# Altium PCB PCB1.PcbDoc
Units mil, origin at the board's own origin, x right, y up, seen from the top; angles counter-clockwise.
Board outline 3095 x 3020 mil, 2 copper layers (Top Layer, Bottom Layer); 16 components, 20 nets, 102 pads, 0 vias.
Unrouted connection lines stored in the file: 1.
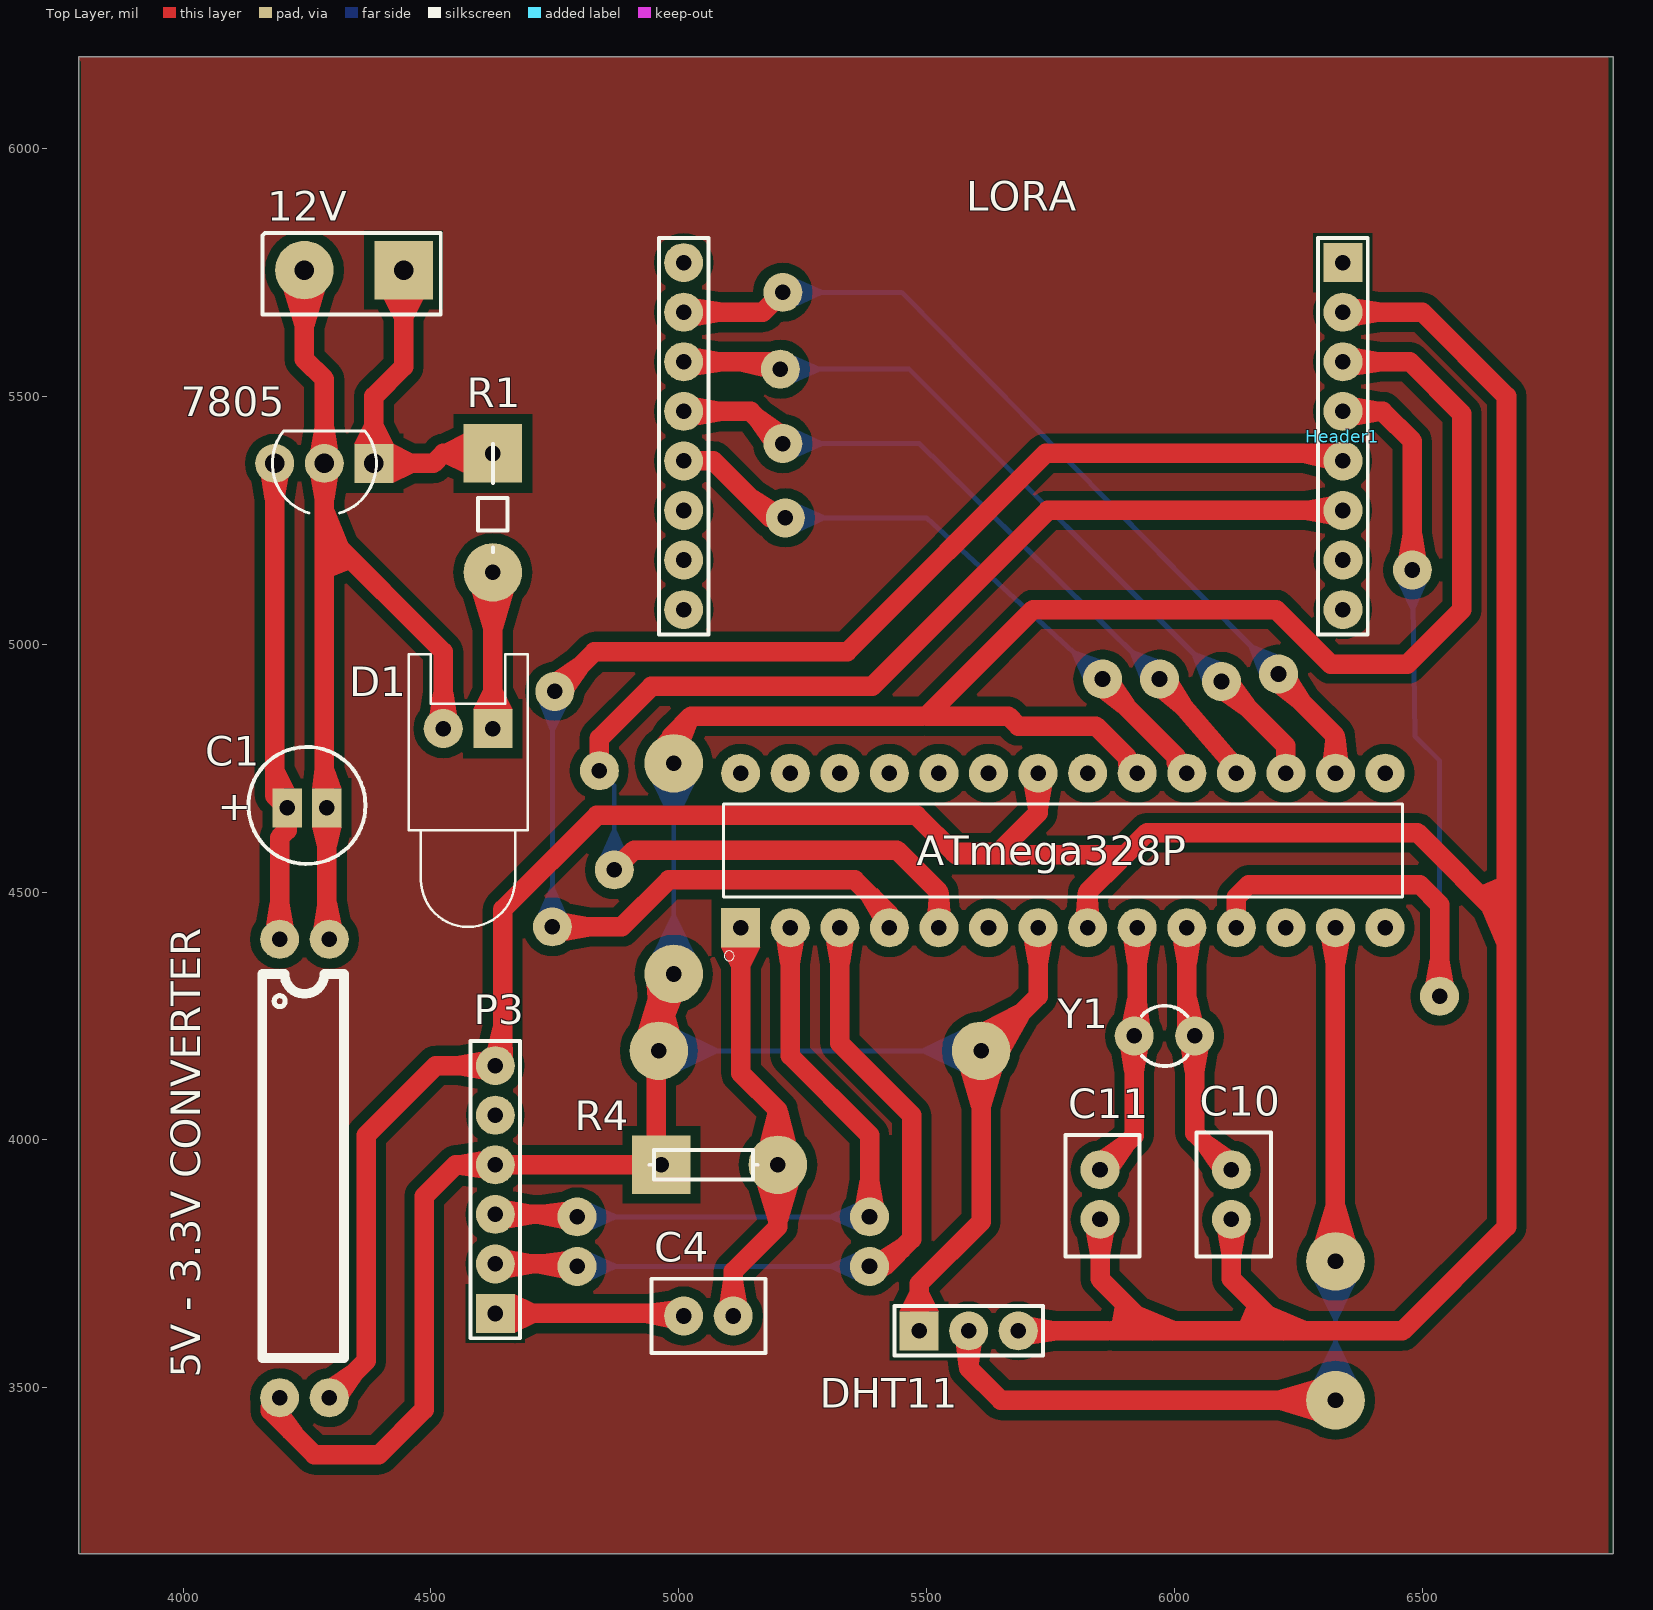
[diagram p0: Top Layer view]
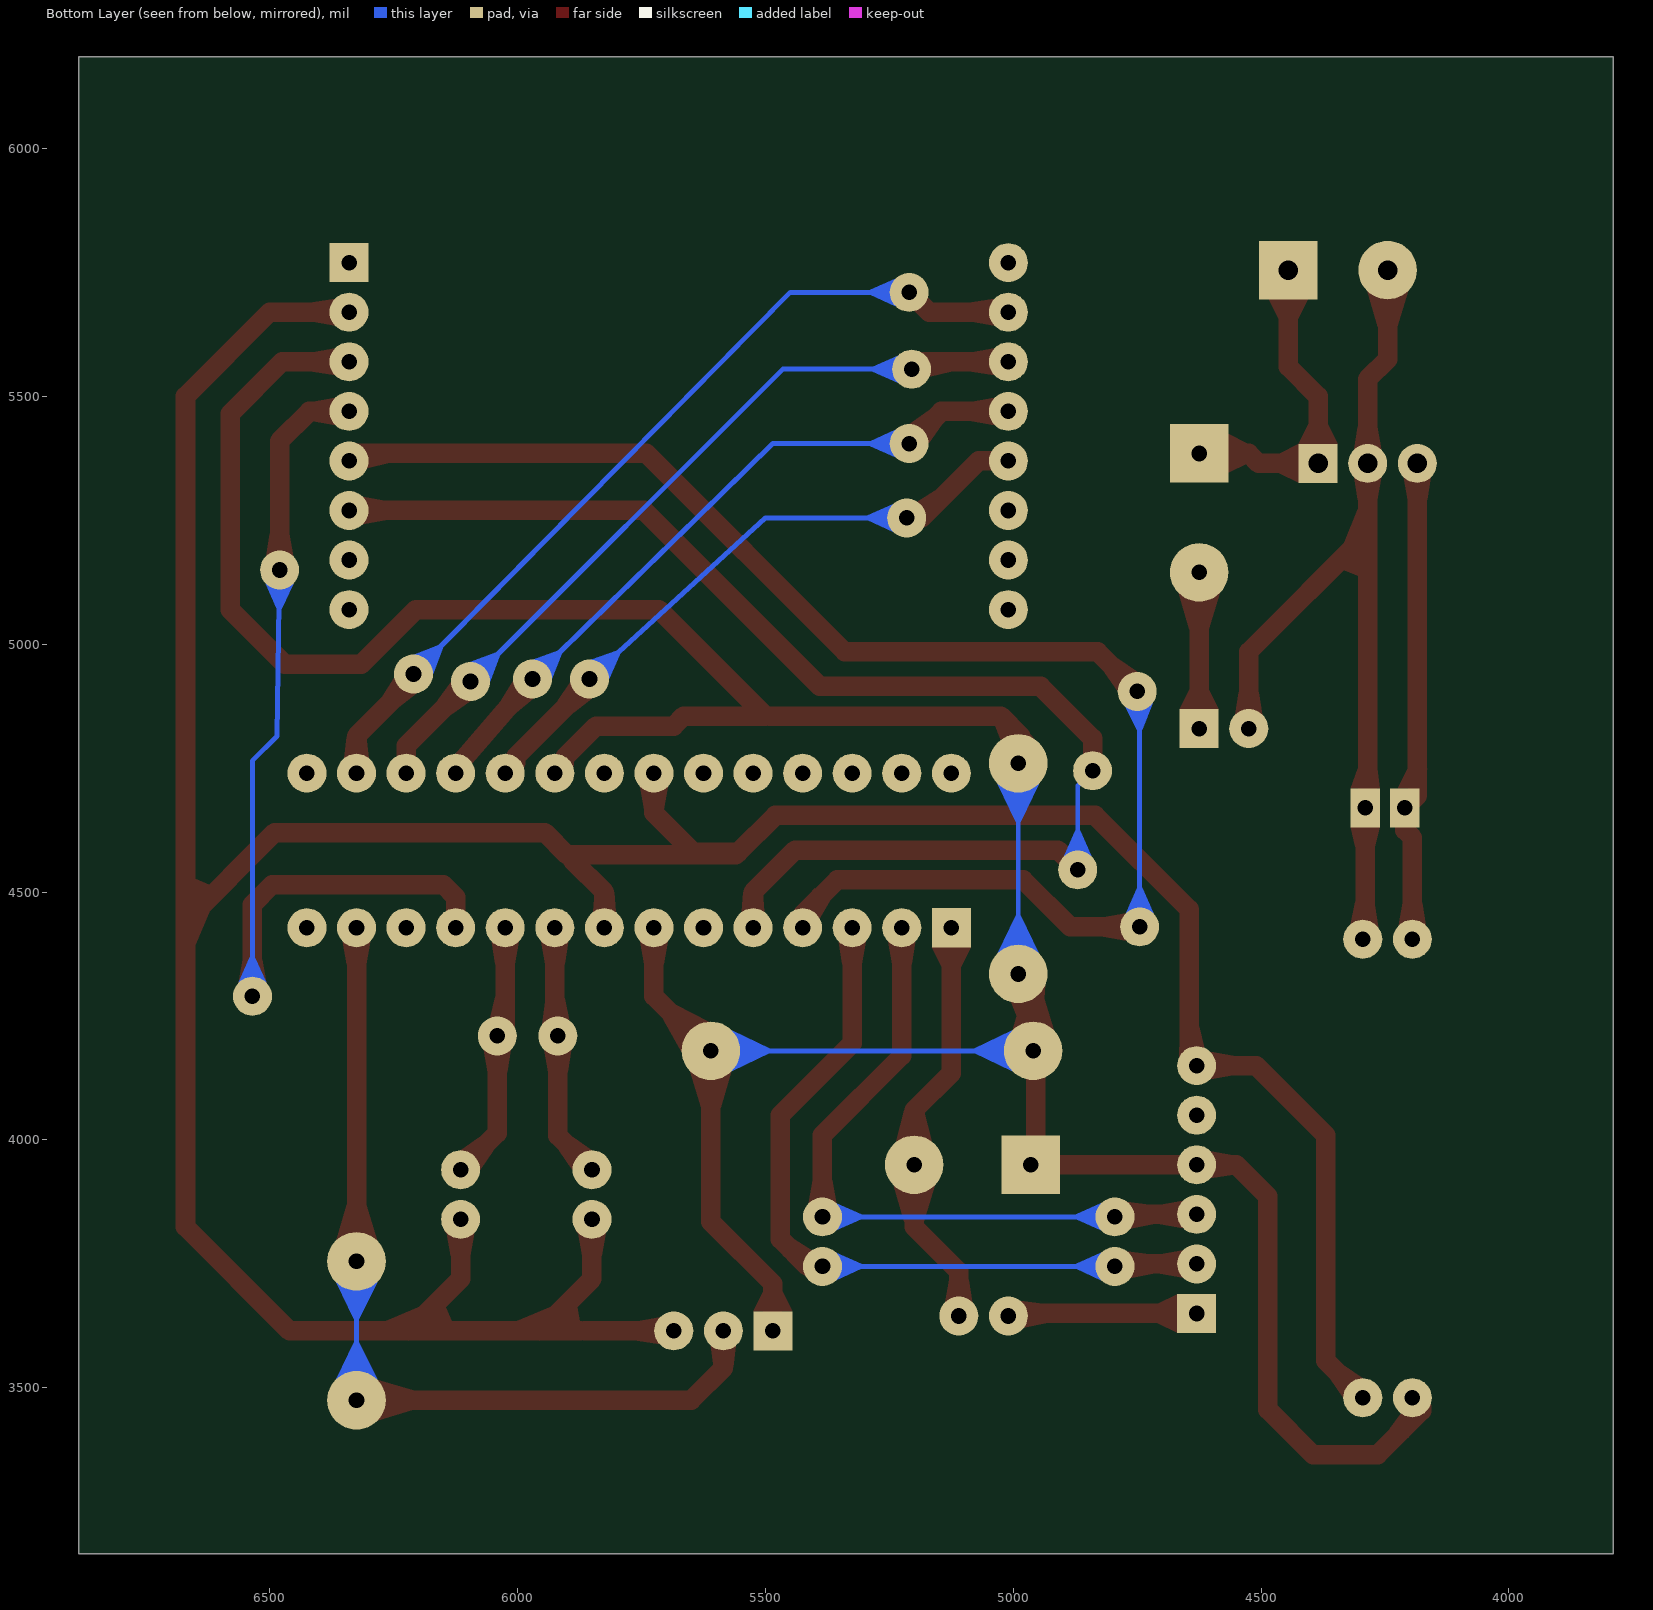
[diagram p1: Bottom Layer view, seen from below]

## Layer stack, top to bottom
Top Solder: solder mask 0.4, Solder Resist, Dk 3.5
Top Layer: signal copper 1.4
Dielectric 1: dielectric 12.6, FR-4, Dk 4.8
Bottom Layer: signal copper 1.4
Bottom Solder: solder mask 0.4, Solder Resist, Dk 3.5

## Board outline
3790,3165 6885,3165 6885,6185 3790,6185

## Design rules (kind name [scope] priority, off if disabled: settings)
Clearance [All] p1: gap=20 ignorepadtopadclearanceinfootprint=TRUE
PolygonConnect [All] p1: connectstyle=Relief reliefconductorwidth=10 reliefentries=4 polygonreliefangle="90 Angle" airgapwidth=10
RoutingVias [All] p1: holewidth=31.5 width=196.85 viastyle="Through Hole" minholewidth=11.81 minwidth=39.37 maxholewidth=59.06 maxwidth=118.11
SolderMaskExpansion [All] p1: expansion=4
Width [All] p1: maxlimit=39.37 minlimit=10 preferedwidth=19.68
30 further rules are at their usual default settings.

## Components (designator, comment, footprint, x,y, rotation, side; value= is the part's Value field where it differs from the comment)
"5V - 3.3V CONVERTER" "Mach Nguon 3.3V" PCBComponent_1 4300,4180 r270 top (schematic designator "Mach Nguon")
12V "12-15 (V)" HDR1X2 4245,5755 r0 top (schematic designator P1)
7805 "LM7805" TO92- 4285,5365 r180 top (schematic designator U1)
ATmega328P "ATmega328P" DIP794W46P254L2967H457Q28B 5775,4584.09 r90 top
C1 "Cap Pol1" RB7.6-15 4250,4675 r0 top value=10uF
C4 "Cap" RAD-0.3#1 5070,3645 r180 top value=100nF
C10 "Cap" RAD-0.3#2 6120,3990 r90 top value=22pF
C11 "Cap" RAD-0.3#3 5855,3875 r90 top value=22pF
D1 "LED0" LED-0 4575,4830 r0 top
DHT11 "DHT11" HDR1X3 5485,3615 r0 top (schematic designator P2)
Header1 "" HDR1X8#1 6340,5070 r90 top
LORA "" HDR1X8#2 5010,5070 r90 top (schematic designator Header2)
P3 "FT232RL" HDR1X6 4630,3650 r90 top
R1 "Res1" AXIAL-0.3#1 4625,5295 r90 top value=470
R4 "Res1" AXIAL-0.3#2 5050,3950 r180 top value=10K
Y1 "16 MHz" R38 5980,4210 r90 top

## Footprints (in the part's own frame and the unit in brackets; to place one, negate y for a bottom-side part, rotate by r counter-clockwise, add the part's x,y. Pads: shape width x height; smd on the part's side, far side on the other; paste and mask are expansions set on the pad)
AXIAL-0.3#1 [mm] "Axial Device, Thru-Hole; 2 Leads; 0.3 in Pin Spacing"
  round 3 hole 0.8: 1(-3.81,0)
  rect 3x3 hole 0.8: 2(2.286,0)
  silkscreen extent -2.77,-0.76 2.77,0.76
AXIAL-0.3#2 [mm] "Axial Device, Thru-Hole; 2 Leads; 0.3 in Pin Spacing"
  round 3 hole 0.8: 1(-3.81,0)
  rect 3x3 hole 0.8 mask+0.102: 2(2.159,0)
  silkscreen extent -2.77,-0.76 2.77,0.76
DIP794W46P254L2967H457Q28B [mm]
  rect 2x2 hole 0.8: 1(-3.96,16.51)
  round 2 hole 0.8: 2(-3.96,13.97) 3(-3.96,11.43) 4(-3.96,8.89) 5(-3.96,6.35) 6(-3.96,3.81) 8(-3.96,-1.27) 9(-3.96,-3.81) 10(-3.96,-6.35) 11(-3.96,-8.89) 12(-3.96,-11.43) 13(-3.96,-13.97) 14(-3.96,-16.51) 15(3.96,-16.51) 16(3.96,-13.97) 17(3.96,-11.43) 18(3.96,-8.89) 19(3.96,-6.35) 21(3.96,-1.27) 22(3.96,1.27) 23(3.96,3.81) 24(3.96,6.35) 25(3.96,8.89) 26(3.96,11.43) 27(3.96,13.97) 28(3.96,16.51)
  round 2 hole 0.8 mask+0.102: 7(-3.96,1.27) 20(3.96,-3.81)
  silkscreen extent -5.65,-17.4 2.38,17.4
HDR1X2 [mm] "Connector; Header; 2 Position"
  round 3 hole 1: 1(0,0)
  rect 3x3 hole 1: 2(5.08,0)
  silkscreen extent -2.16,-2.29 6.98,1.91
HDR1X3 [mm] "Connector; Header; 3 Position"
  rect 2x2 hole 0.8 mask+0.102: 1(0,0)
  round 2 hole 0.8: 2(2.54,0) 3(5.08,0)
  silkscreen extent -1.27,-1.27 6.35,1.27
HDR1X6 [mm] "Connector; Header; 6 Position"
  rect 2x2 hole 0.8: 1(0,0)
  round 2 hole 0.8: 2(2.54,0) 3(5.08,0) 5(10.16,0) 6(12.7,0)
  round 2 hole 0.8 mask+0.102: 4(7.62,0)
  silkscreen extent -1.27,-1.27 13.97,1.27
HDR1X8#1 [mm] "Connector; Header; 8 Position"
  round 2 hole 0.8: 1(0,0) 2(2.54,0) 3(5.08,0) 4(7.62,0) 5(10.16,0) 7(15.24,0)
  round 2 hole 0.8 mask+0.102: 6(12.7,0)
  rect 2x2 hole 0.8: 8(17.78,0)
  silkscreen extent -1.27,-1.27 19.05,1.27
HDR1X8#2 [mm] "Connector; Header; 8 Position"
  round 2 hole 0.8: 1(0,0) 2(2.54,0) 3(5.08,0) 4(7.62,0) 5(10.16,0) 6(12.7,0) 7(15.24,0) 8(17.78,0)
  silkscreen extent -1.27,-1.27 19.05,1.27
LED-0 [mm] "LED; 2 Leads"
  rect 2x2 hole 0.8: 1(1.27,0)
  round 2 hole 0.8: 2(-1.27,0)
  silkscreen extent -3.05,-10.16 3.05,3.81
PCBComponent_1 [mm]
  round 2 hole 0.8: 1(-5.715,-2.667) 2(-5.715,-0.127) 4(17.78,-0.127)
  round 2 hole 0.8 mask+0.102: 3(17.78,-2.667)
R38 [mm] "Crystal, Thru-Hole; 2 Leads; Body 3.1 x 8.2 mm (Dia.xH)"
  round 2 hole 0.8: 1(0,1.55) 2(0,-1.55)
  silkscreen extent -1.55,-1.19 1.55,1.17
RAD-0.3#1 [mm] "Radial Cap, Thru-Hole; 2 Leads; 0.3 in Pin Spacing"
  round 2 hole 0.8: 1(-1.016,0) 2(1.524,0)
  silkscreen extent -2.67,-1.91 3.18,1.91
RAD-0.3#2 [mm] "Radial Cap, Thru-Hole; 2 Leads; 0.3 in Pin Spacing"
  round 2 hole 0.8: 1(-3.81,0.127) 2(-1.27,0.127)
  silkscreen extent -5.71,-1.91 0.64,1.91
RAD-0.3#3 [mm] "Radial Cap, Thru-Hole; 2 Leads; 0.3 in Pin Spacing"
  round 2 hole 0.8: 1(-0.889,0.127) 2(1.651,0.127)
  silkscreen extent -2.79,-1.91 3.43,1.91
RB7.6-15 [mm] "Polarized Capacitor (Radial); 2 Leads"
  rect 1.5x2 hole 0.8: 1(-1.016,-0.127) 2(1.016,-0.127)
  silkscreen extent -3,-3 3,3
TO92- [mm]
  rect 2x2 hole 1: 1(-2.54,0)
  round 2 hole 1: 2(0,0) 3(2.54,0)
  silkscreen extent -2.66,-1.65 2.66,2.55

## Part data
"5V - 3.3V CONVERTER": library part Component_1
12V: library part "Header 2", "Header, 2-Pin", LatestRevisionDate=17-Jul-2002, LatestRevisionNote="Re-released for DXP Platform.", Publisher="Altium Limited"
7805: "IC REG LIN 5V 1A"
C1: "Polarized Capacitor (Radial)", LatestRevisionDate=17-Jul-2002, LatestRevisionNote="Re-released for DXP Platform.", PackageDescription="Polarized Capacitor (Radial); 2 Leads", PackageReference=RB7.6-15, Published=8-Jun-2000, Publisher="Altium Limited"
C4 C10 C11: "Capacitor", LatestRevisionDate=17-Jul-2002, LatestRevisionNote="Re-released for DXP Platform.", PackageDescription="Radial Cap, Thru-Hole; 2 Leads; 0.3 in Pin Spacing", PackageReference=RAD-0.3, Published=8-Jun-2000, Publisher="Altium Limited"
D1: "Typical INFRARED GaAs LED", LatestRevisionDate=08-Jul-2005, LatestRevisionNote="Mech Layer 1 removed.", PackageDescription="LED; 2 Leads", PackageReference=LED-0, Published=8-Jun-2000, Publisher="Altium Limited"
DHT11: library part "Header 3", "Header, 3-Pin", LatestRevisionDate=17-Jul-2002, LatestRevisionNote="Re-released for DXP Platform.", Publisher="Altium Limited"
Header1 LORA: library part "Header 8", "Header, 8-Pin", LatestRevisionDate=17-Jul-2002, LatestRevisionNote="Re-released for DXP Platform.", Publisher="Altium Limited"
P3: library part "Header 6", "Header, 6-Pin", LatestRevisionDate=17-Jul-2002, LatestRevisionNote="Re-released for DXP Platform.", Publisher="Altium Limited"
R1 R4: "Resistor", LatestRevisionDate=17-Jul-2002, LatestRevisionNote="Re-released for DXP Platform.", PackageDescription="Axial Device, Thru-Hole; 2 Leads; 0.3 in Pin Spacing", PackageReference=AXIAL-0.3, Published=8-Jun-2000, Publisher="Altium Limited"
Y1: library part XTAL, "Crystal Oscillator", LatestRevisionDate=17-Jul-2002, LatestRevisionNote="Re-released for DXP Platform.", PackageDescription="Crystal, Thru-Hole; 2 Leads; Body 3.1 x 8.2 mm (Dia.xH)", PackageReference=R38, Published=8-Jun-2000, Publisher="Altium Limited"

## Free pads (board coordinates)
  round 78.74 hole 31.5: 2(5385,3845) 3(5385,3745) 4(4795,3845) 5(4795,3745) 12(4870,4545) 13(4745,4430) 14(4840,4745) 15(4750,4905) 18(6535,4290) 19(6480,5150) 20(6210,4940) 21(6095,4925) 22(5970,4930) 23(5855,4930) 24(5210,5710) 25(5205,5555) 26(5210,5405) 27(5215,5255)
  round 118.11 hole 31.5 mask+4: 6(4960,4180) 7(5610,4180) 8(4990,4335) 9(4990,4760)
  round 118.11 hole 31.5: 10(6325,3475) 11(6325,3755)

## Nets (pads, with @x,y where several pads share a name; then routed paths per layer and width w, separated by ;. In a path a pad name is that pad's centre, name@x,y a point inside that pad or via, vN(x,y) a via of type N, cw(c..) or ccw(c..) an arc to the next point about the centre after c; other vN are vias at no path point)
1: ATmega328P.1 C4.1 R4.1 | length 851.5
  Top Layer w39.37: C4.1 5110,3735 5200,3825 R4.1 5200,4060 5125,4135 ATmega328P.1
3.3V: "5V - 3.3V CONVERTER.3" ATmega328P.7 ATmega328P.20 DHT11.1 Header1.6 P3.4 pad.6 pad.7 pad.8 pad.9 R4.2 | length 6775.6
  Top Layer w39.37: 4195,3480 4176.25,3461.25 4176.25,3453.75 4265,3365 4395,3365 4486.25,3456.25 4486.25,3886.25 4550,3950 P3.4 R4.2 4955,3960 4955,4165 pad.6 4960,4305 pad.8 ; pad.9 4975,4790 4985,4800 4985,4815 5025,4855 5490,4855 ; DHT11.1 5485,3710 5610,3835 pad.7 ; pad.7@5591.25,4161.25 pad.7 ; ATmega328P.7 5725,4290 5615,4180 pad.7 ; ATmega328P.20 5906.25,4758.75 5906.25,4768.75 5904.06,4770.94 5904.06,4772.75 5841.8,4835 5685,4835 5665,4855 5500,4855 5715,5070 6205,5070 6315,4960 6470,4960 6580,5070 6580,5465 6475,5570 Header1.6
  Bottom Layer w10: pad.6 pad.7 ; pad.8 pad.9
+: 12V.2 7805.1 R1.2 | length 663.1
  Top Layer w39.37: 12V.2 4445,5560 4385,5500 7805.1 4505,5365 4525,5385 R1.2
CTS: P3.5
DIO0: ATmega328P.4 Header1.4 pad.13 pad.15 | length 3047.3
  Top Layer w39.37: pad.13 4885,4430 4980,4525 5355,4525 5425,4455 ATmega328P.4 ; pad.15 4830,4985 5340,4985 5740,5385 6325,5385 Header1.4
  Bottom Layer w10: pad.13 4745,4900 pad.15
DIO1: ATmega328P.5 Header1.3 pad.12 pad.14 | length 2746.6
  Top Layer w39.37: pad.14 4840,4810 4945,4915 5390,4915 5745,5270 Header1.3 ; pad.12 4910,4585 5440,4585 5525,4500 ATmega328P.5
  Bottom Layer w10: pad.14 4870,4715 pad.12
DTR: C4.2 P3.1 | length 382.1
  Top Layer w39.37: P3.1 5005,3650 C4.2
GND: 12V.1 7805.2 "5V - 3.3V CONVERTER.2" "5V - 3.3V CONVERTER.4" ATmega328P.8 ATmega328P.22 C1.2 C10.1 C11.1 D1.2 DHT11.3 Header1.7 P3.6 | length 9469.1
  Top Layer w39.37: 12V.1 4245,5575 4285,5535 7805.2 4285,5225 ; 4295,3480 4370,3555 4370,4010 4510,4150 P3.6 4645,4165 4645,4465 4835,4655 5480,4655 5555,4580 5565,4580 ; 4295,4405 4290,4410 C1.2 4285,4675 4285,5225 ; D1.2 4525,4985 4285,5225 ; DHT11.3 5865,3615 ; ATmega328P.22 5725,4660 5645,4580 5565,4580 ; ATmega328P.8 5825,4500 5890,4565 5890,4575 ; C11.1@5865,3825 C11.1 5850,3720 5955,3615 ; 5875,3615 5955,3615 ; C10.1@6130,3825 C10.1 6115,3720 6220,3615 ; Header1.7 6500,5670 6670,5500 6670,4440 ; 5565,4580 5560,4575 5890,4575 ; 5890,4575 5900,4575 5945,4620 6490,4620 6670,4440 ; 5955,3615 6220,3615 ; 6220,3615 6460,3615 6670,3825 6670,4440
MISO: ATmega328P.18 LORA.5 pad.22 pad.26 | length 1428.3
  Top Layer w10: ATmega328P.18 ATmega328P.18@6125,4750
  Top Layer w39.37: LORA.5 5145,5470 pad.26 ; pad.22 ATmega328P.18@6125,4750
  Bottom Layer w10: pad.26 5485,5405 pad.22
MOSI: ATmega328P.17 LORA.6 pad.21 pad.25 | length 1611
  Top Layer w39.37: LORA.6 5190,5570 pad.25 ; pad.21@6115,4925 pad.21 6225,4795 ATmega328P.17
  Bottom Layer w10: pad.25 5465,5555 pad.21
NetC1_1: 7805.3 "5V - 3.3V CONVERTER.1" C1.1 | length 976.6
  Top Layer w39.37: 7805.3 4185,4695 C1.1 4210,4625 4195,4610 4195,4405
NetD1_1: D1.1 R1.1 | length 315
  Top Layer w39.37: D1.1 R1.1
NSS: ATmega328P.16 LORA.7 pad.20 pad.24 | length 1786.1
  Top Layer w39.37: LORA.7 5170,5670 pad.24 ; pad.20 6210,4930 6325,4815 ATmega328P.16
  Bottom Layer w10: pad.24 5450,5710 pad.20
Out: ATmega328P.13 DHT11.2 pad.10 pad.11 | length 1795.1
  Top Layer w39.37: DHT11.2 5585,3540 5650,3475 pad.10 ; pad.11 ATmega328P.13
  Bottom Layer w10: pad.10 pad.11
RST: ATmega328P.11 Header1.5 pad.18 pad.19 | length 1989.3
  Top Layer w39.37: ATmega328P.11 6125,4490 6150,4515 6495,4515 6535,4475 pad.18 ; Header1.5 6420,5470 6480,5410 pad.19
  Bottom Layer w10: pad.19 6485,4815 6535,4765 pad.18
RX: ATmega328P.3 P3.2 pad.3 pad.5 | length 1552.2
  Top Layer w39.37: P3.2 4785,3750 pad.5 ; ATmega328P.3 5325,4195 5470,4050 5470,3800 5415,3745 pad.3
  Bottom Layer w10: pad.5 pad.3
SCK: ATmega328P.19 LORA.4 pad.23 pad.27 | length 1318.4
  Top Layer w10: pad.23@5840,4925 pad.23 pad.23@5860,4925 ; ATmega328P.19@6025,4751.8 ATmega328P.19@6025,4760
  Top Layer w39.37: LORA.4 5070,5370 5185,5255 pad.27 ; pad.23@5860,4925 5860,4916.8 6004.06,4772.75 6004.06,4760.94 ATmega328P.19 ATmega328P.19@6025,4725
  Bottom Layer w10: pad.27 5500,5255 pad.23
TX: ATmega328P.2 P3.3 pad.2 pad.4 | length 1406.5
  Top Layer w10: pad.4@4790,3850 pad.4
  Top Layer w39.37: P3.3 pad.4@4790,3850 ; ATmega328P.2 5225,4170 5385,4010 pad.2
  Bottom Layer w10: pad.4 pad.2
XTAL1: ATmega328P.9 C11.2 Y1.1 | length 519.3
  Top Layer w39.37: C11.2 5918.98,4008.98 Y1.1 5925,4216.02 ATmega328P.9
XTAL2: ATmega328P.10 C10.2 Y1.2 | length 525.5
  Top Layer w39.37: ATmega328P.10 6025,4226.02 Y1.2 6041.02,4013.98 C10.2
pads on no net: ATmega328P.6 ATmega328P.12 ATmega328P.14 ATmega328P.15 ATmega328P.21 ATmega328P.23 ATmega328P.24 ATmega328P.25 ATmega328P.26 ATmega328P.27 ATmega328P.28 Header1.1 Header1.2 Header1.8 LORA.1 LORA.2 LORA.3 LORA.8

## Polygon pours and split planes (outlines as drawn)
no net on Top Layer "Top Layer-No Net" (solid, pour order 11): 3790,6180 3795,6175 3795,3165 6870,3165 6875,3160 6875,6185 3790,6185

## Silkscreen, mask and mechanical layers (free items; w line width, h text height)
Top Overlay:
  circle w10: c4195,4280 r11.18
  lines w19.68: 4160,3560 4325,3560 4325,4335 4285.31,4335 cw(c4245,4335) 4204.69,4335 4160,4335 4160,3560

## Text inside footprints (layer, text, board x,y; h text height)
C1: Top Overlay "+" at 4070,4645 h59.06